# Altium PCB MEZ_ALL_IND.PcbDoc
Units mm, origin at the board's own origin, x right, y up, seen from the top; angles counter-clockwise.
Board outline 73.5 x 43 mm, 2 copper layers (Top Layer, Bottom Layer); 7 components, 16 nets, 63 pads, 0 vias.
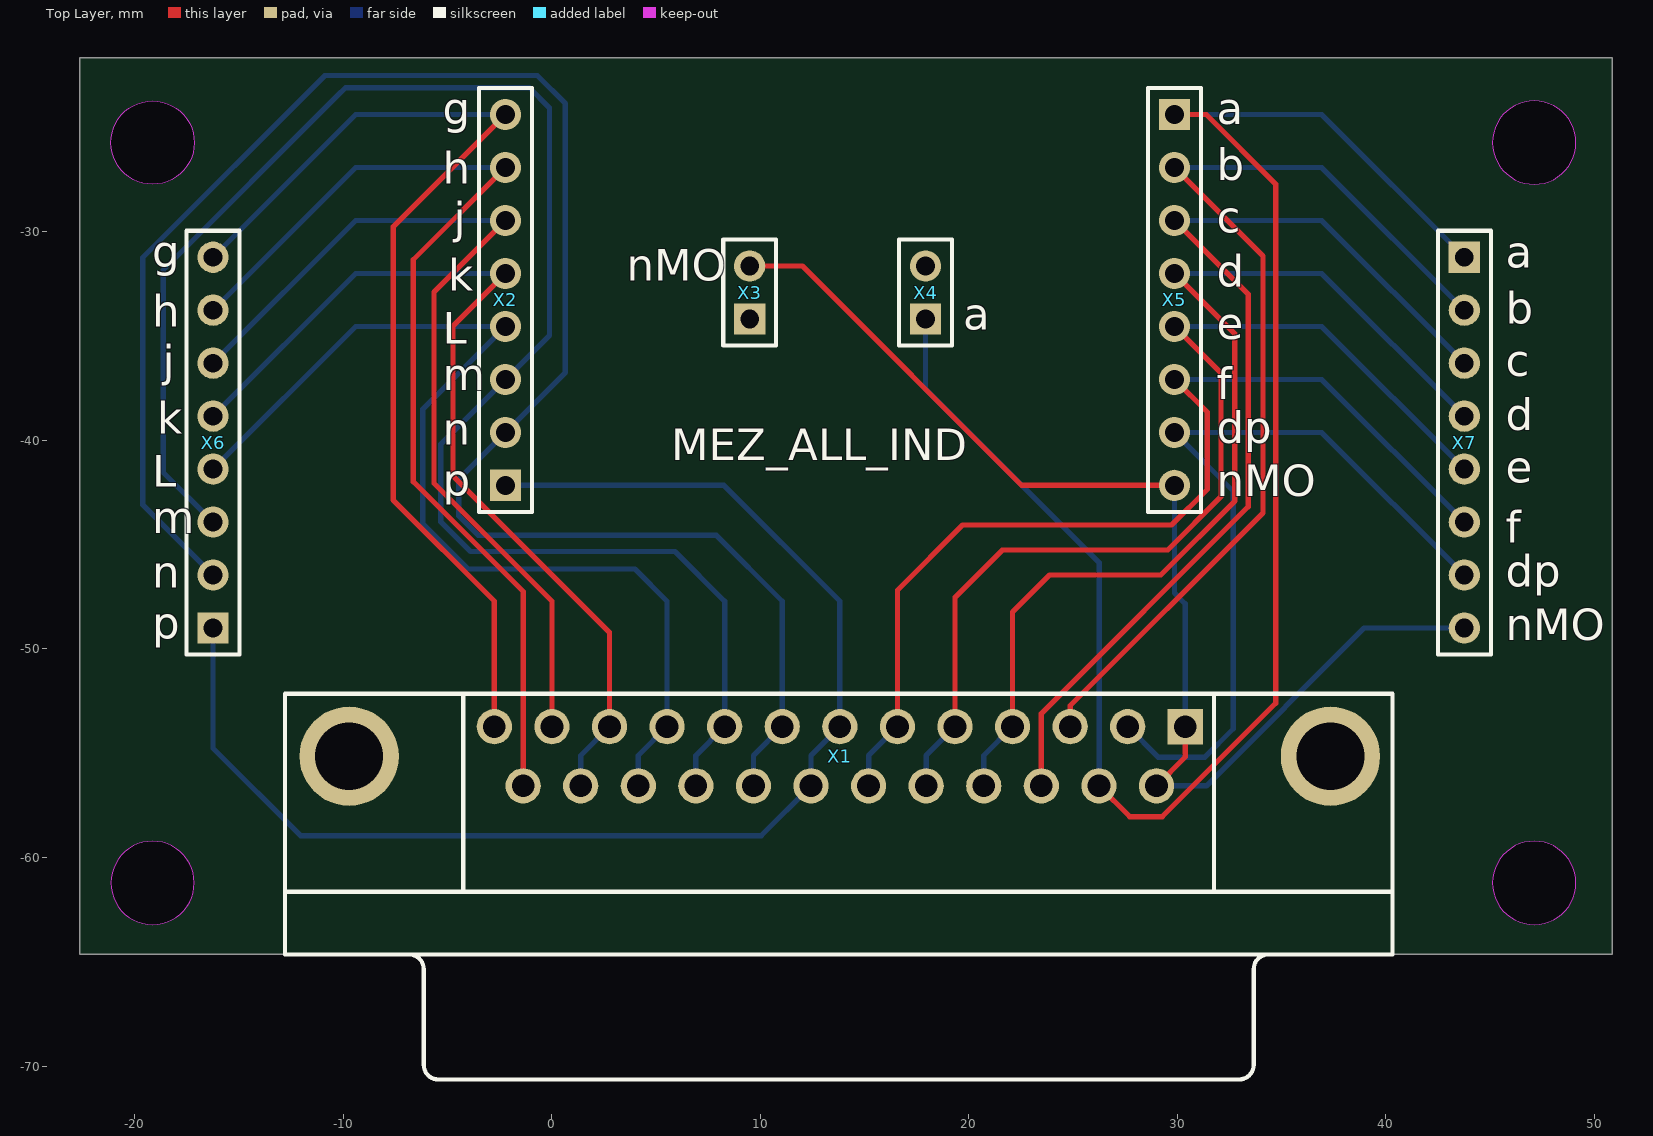
[diagram p0: Top Layer view]
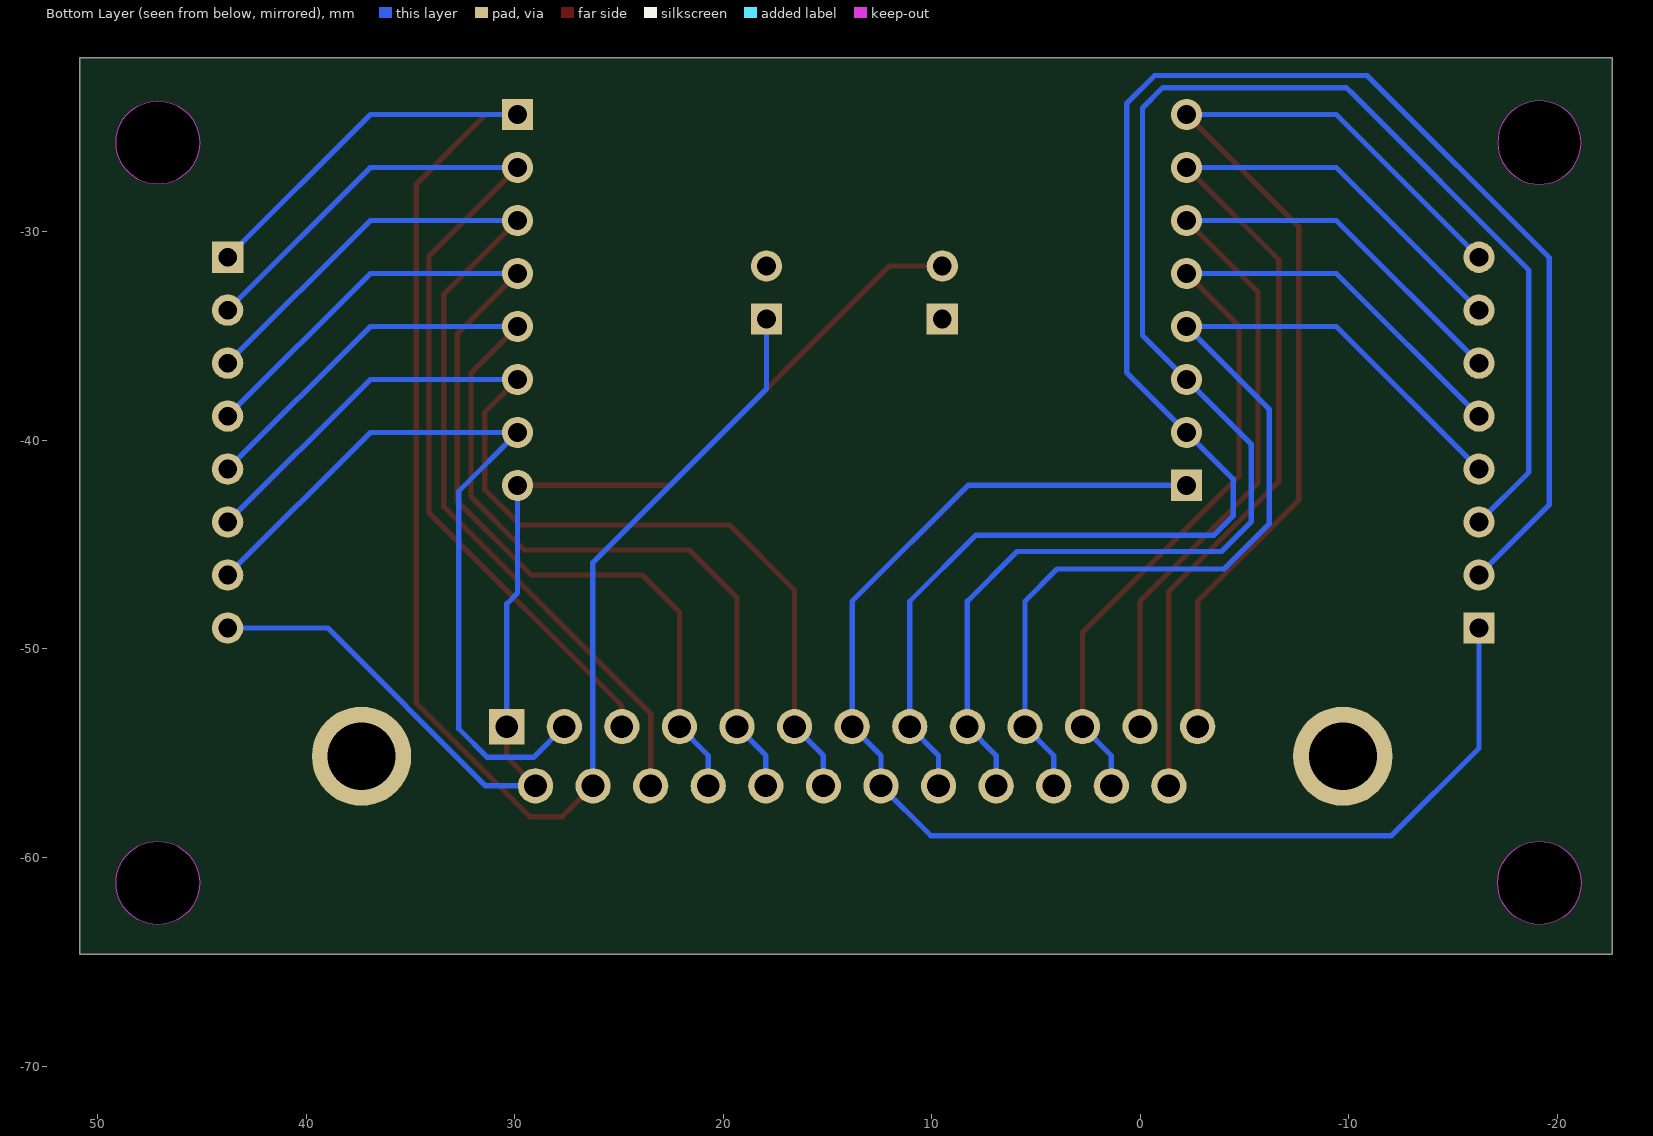
[diagram p1: Bottom Layer view, seen from below]

## Layer stack, top to bottom
Top Solder: solder mask 0.0102, Solder Resist, Dk 3.5
Top Layer: signal copper 0.0356
Dielectric 1: dielectric 0.32, FR-4, Dk 4.8
Bottom Layer: signal copper 0.0356
Bottom Solder: solder mask 0.0102, Solder Resist, Dk 3.5

## Board outline
-22.631,-64.643 50.869,-64.643 50.869,-21.643 -22.631,-21.643
cut-out: -21.131,-61.218 ccw(c-19.131,-61.218) -19.131,-63.218 ccw(c-19.131,-61.218) -17.131,-61.218 ccw(c-19.131,-61.218) -19.131,-59.218 ccw(c-19.131,-61.218)
cut-out: 45.119,-61.218 ccw(c47.119,-61.218) 47.119,-63.218 ccw(c47.119,-61.218) 49.119,-61.218 ccw(c47.119,-61.218) 47.119,-59.218 ccw(c47.119,-61.218)
cut-out: 45.119,-25.718 ccw(c47.119,-25.718) 47.119,-27.718 ccw(c47.119,-25.718) 49.119,-25.718 ccw(c47.119,-25.718) 47.119,-23.718 ccw(c47.119,-25.718)
cut-out: -19.131,-27.718 cw(c-19.131,-25.718) -21.131,-25.718 cw(c-19.131,-25.718) -19.131,-23.718 cw(c-19.131,-25.718) -17.131,-25.718 cw(c-19.131,-25.718)

## Design rules (kind name [scope] priority, off if disabled: settings)
Clearance [All] p1: gap=0.254 ignorepadtopadclearanceinfootprint=FALSE except(0: Arc-Hole Track-Hole SMDPad-Hole THPad-Hole Via-Hole Fill-Hole Poly-Hole Region-Hole Text-Hole)
PolygonConnect [All] p1: connectstyle=Relief reliefconductorwidth=0.254 reliefentries=4 polygonreliefangle="90 Angle" airgapwidth=0.254
RoutingVias [All] p1: holewidth=0.711 width=1.27 viastyle="Through Hole" minholewidth=0.711 minwidth=1.27 maxholewidth=0.711 maxwidth=1.27
SolderMaskExpansion [All] p1: expansion=0.102 istentingtop=FALSE
Width [All] p1: maxlimit=0.254 minlimit=0.254 preferedwidth=0.254
30 further rules are at their usual default settings.

## Components (designator, comment, footprint, x,y, rotation, side; value= is the part's Value field where it differs from the comment)
X1 "D Connector 25" DSUB1.385-2H25A 13.822,-64.644 r180 top
X2 "Header 8" HDR1X8 -2.211,-42.156 r90 top
X3 "Header 2" HDR1X2 9.499,-34.18 r90 top
X4 "Header 2" HDR1X2 17.931,-34.18 r90 top
X5 "Header 8" HDR1X8 29.869,-24.376 r270 top
X6 "Header 8" HDR1X8 -16.231,-48.997 r90 top
X7 "Header 8" HDR1X8 43.769,-31.217 r270 top

## Footprints (in the part's own frame and the unit in brackets; to place one, negate y for a bottom-side part, rotate by r counter-clockwise, add the part's x,y. Pads: shape width x height; smd on the part's side, far side on the other; paste and mask are expansions set on the pad)
DSUB1.385-2H25A [mm] "Connector; D Subminiature; 25 Position; Right Angle; Pitch 1.385 mm"
  rect 1.69x1.69 hole 1.09: 1(-16.566,-10.92)
  round 1.69 hole 1.09: 2(-13.805,-10.92) 3(-11.044,-10.92) 4(-8.283,-10.92) 5(-5.522,-10.92) 6(-2.761,-10.92) 7(0,-10.92) 8(2.761,-10.92) 9(5.522,-10.92) 10(8.283,-10.92) 11(11.044,-10.92) 12(13.805,-10.92) 13(16.566,-10.92) 14(-15.185,-8.08) 15(-12.424,-8.08) 16(-9.663,-8.08) 17(-6.902,-8.08) 18(-4.141,-8.08) 19(-1.38,-8.08) 20(1.381,-8.08) 21(4.142,-8.08) 22(6.903,-8.08) 23(9.664,-8.08) 24(12.425,-8.08) 25(15.186,-8.08)
  round 4.76 hole 3.26: 26(-23.526,-9.5) 27(23.526,-9.5)
  silkscreen extent -26.5,-12.5 26.6,6
HDR1X2 [mm] "Connector; Header; 2 Position"
  rect 1.5x1.5 hole 0.9: 1(0,0)
  round 1.5 hole 0.9: 2(2.54,0)
  silkscreen extent -1.27,-1.27 3.81,1.27
HDR1X8 [mm] "Connector; Header; 8 Position"
  rect 1.5x1.5 hole 0.9: 1(0,0)
  round 1.5 hole 0.9: 2(2.54,0) 3(5.08,0) 4(7.62,0) 5(10.16,0) 6(12.7,0) 7(15.24,0) 8(17.78,0)
  silkscreen extent -1.27,-1.27 19.05,1.27

## Part data
X1: "Receptacle Assembly, 25 Position, Right Angle", PackageDocument=U, DatasheetDocument=19-Mar-1999, Gender=Receptacle, LatestRevisionDate=17-Jul-2002, LatestRevisionNote="Re-released for DXP Platform.", Orientation="Right Angle", PackageReference=787202, Positions=25, Published=15-Jun-2001, Publisher="Altium Limited"
X2 X5 X6 X7: "Header, 8-Pin", LatestRevisionDate=17-Jul-2002, LatestRevisionNote="Re-released for DXP Platform.", Publisher="Altium Limited"
X3 X4: "Header, 2-Pin", LatestRevisionDate=17-Jul-2002, LatestRevisionNote="Re-released for DXP Platform.", Publisher="Altium Limited"

## Nets (pads, with @x,y where several pads share a name; then routed paths per layer and width w, separated by ;. In a path a pad name is that pad's centre, name@x,y a point inside that pad or via, vN(x,y) a via of type N, cw(c..) or ccw(c..) an arc to the next point about the centre after c; other vN are vias at no path point)
\M\O\: X1.1 X1.14 X3.2 X5.8 X7.8 | length 57.8
  Top Layer w0.254: X3.2 12.031,-31.64 22.547,-42.156 X5.8 ; X1.14 30.388,-55.184 X1.1
  Bottom Layer w0.254: X1.14 31.396,-56.564 38.964,-48.997 X7.8 ; X5.8 29.869,-47.319 30.388,-47.838 X1.1
a: X1.15 X4.1 X5.1 X7.1 | length 85
  Top Layer w0.254: X1.15 27.722,-58.04 29.285,-58.04 34.722,-52.603 34.722,-27.704 31.393,-24.376 X5.1
  Bottom Layer w0.254: X4.1 17.931,-37.533 26.258,-45.859 X1.15@26.258,-56.564 ; X5.1 36.928,-24.376 X7.1
b: X1.3 X5.2 X7.2 | length 49.1
  Top Layer w0.254: X1.3 24.866,-52.724 34.112,-43.478 34.112,-31.158 X5.2
  Bottom Layer w0.254: X5.2 36.928,-26.916 X7.2
c: X1.16 X5.3 X7.3 | length 49.4
  Top Layer w0.254: X1.16 23.486,-53.095 33.401,-43.18 33.401,-32.987 X5.3
  Bottom Layer w0.254: X5.3 36.928,-29.456 X7.3
d: X1.4 X1.17 X5.4 X7.4 | length 50.6
  Top Layer w0.254: X1.4 22.105,-48.227 23.876,-46.457 29.21,-46.457 32.765,-42.902 32.765,-34.891 X5.4
  Bottom Layer w0.254: X1.17 20.725,-55.105 X1.4 ; X5.4 36.928,-31.996 X7.4
dp: X1.2 X5.7 X7.7 | length 38.3
  Bottom Layer w0.254: X1.2 29.098,-55.195 31.317,-55.195 32.689,-53.824 32.689,-42.435 X5.7 36.928,-39.616 X7.7
e: X1.5 X1.18 X5.5 X7.5 | length 50.2
  Top Layer w0.254: X1.5 19.344,-47.525 21.614,-45.254 29.549,-45.254 32.105,-42.698 32.105,-36.771 X5.5
  Bottom Layer w0.254: X1.18 17.964,-55.105 X1.5 ; X5.5 36.928,-34.536 X7.5
f: X1.6 X1.19 X5.6 X7.6 | length 49.5
  Top Layer w0.254: X1.6 16.583,-47.187 19.709,-44.061 29.726,-44.061 31.444,-42.343 31.444,-38.65 X5.6
  Bottom Layer w0.254: X1.19 15.203,-55.105 X1.6 ; X5.6 36.928,-37.076 X7.6
g: X1.13 X2.8 X6.8 | length 50.4
  Top Layer w0.254: X1.13 -2.744,-47.712 -7.596,-42.86 -7.596,-29.76 X2.8
  Bottom Layer w0.254: X6.8 -9.39,-24.376 X2.8
h: X1.25 X2.7 X6.7 | length 50.5
  Top Layer w0.254: X2.7 -6.63,-31.335 -6.63,-41.978 -1.352,-47.256 X1.25@-1.352,-56.564
  Bottom Layer w0.254: X6.7 -9.39,-26.916 X2.7
j: X1.12 X2.6 X6.6 | length 44.9
  Top Layer w0.254: X2.6 -5.64,-32.885 -5.64,-42.055 0.017,-47.712 X1.12
  Bottom Layer w0.254: X6.6 -9.39,-29.456 X2.6
k: X1.11 X1.24 X2.5 X6.5 | length 46.1
  Top Layer w0.254: X2.5 -4.725,-34.51 -4.725,-41.698 2.778,-49.202 X1.11
  Bottom Layer w0.254: X6.5 -9.39,-31.996 X2.5 ; X1.24 1.398,-55.105 X1.11
l: X1.10 X1.23 X2.4 X6.4 | length 50.6
  Bottom Layer w0.254: X6.4 -9.39,-34.536 X2.4 -6.173,-38.498 -6.173,-44.01 -4.014,-46.169 3.996,-46.169 5.539,-47.712 X1.10 4.159,-55.105 X1.23
m: X1.9 X1.22 X2.3 X6.3 | length 82.2
  Bottom Layer w0.254: X6.3 -18.618,-41.529 -18.618,-31.826 -10.236,-23.444 -9.881,-23.089 -1.067,-23.089 -0.102,-24.054 -0.102,-34.966 X2.3 -5.31,-40.174 -5.31,-43.908 -3.887,-45.331 5.919,-45.331 8.3,-47.712 X1.9 6.92,-55.105 X1.22
n: X1.8 X1.21 X2.2 X6.2 | length 89.6
  Bottom Layer w0.254: X6.2 -19.609,-43.078 -19.609,-31.242 -10.871,-22.504 -0.686,-22.504 0.66,-23.851 0.66,-36.744 X2.2 -4.446,-41.851 -4.446,-43.629 -3.532,-44.543 7.892,-44.543 11.061,-47.712 X1.8 9.681,-55.105 X1.21
p: X1.7 X1.20 X2.1 X6.1 | length 64.9
  Bottom Layer w0.254: X6.1 -16.231,-54.762 -12.04,-58.953 10.053,-58.953 X1.20 12.442,-55.105 X1.7 13.822,-47.712 8.266,-42.156 X2.1
pads on no net: X1.26 X1.27 X3.1 X4.2

## Silkscreen, mask and mechanical layers (free items; w line width, h text height)
Top Overlay:
  text "g" at -5.208,-24.833 h1.52
  text "a" at 31.901,-24.833 h1.52
  text "b" at 31.901,-27.525 h1.52
  text "h" at -5.208,-27.703 h1.52
  text "c" at 31.901,-30.04 h1.52
  text "j" at -4.7,-30.091 h1.52
  text "g" at -19.153,-31.691 h1.52
  text "a" at 45.744,-31.716 h1.52
  text "nMO" at 3.606,-32.351 h1.52
  text "d" at 31.901,-32.631 h1.52
  text "k" at -4.954,-32.834 h1.52
  text "b" at 45.744,-34.409 h1.52
  text "h" at -19.153,-34.561 h1.52
  text "a" at 19.735,-34.688 h1.52
  text "e" at 31.901,-35.145 h1.52
  text "L" at -5.208,-35.374 h1.52
  text "c" at 45.744,-36.923 h1.52
  text "j" at -18.645,-36.949 h1.52
  text "m" at -5.208,-37.584 h1.52
  text "f" at 31.901,-38.015 h1.52
  text "d" at 45.744,-39.514 h1.52
  text "k" at -18.899,-39.692 h1.52
  text "dp" at 31.902,-40.132 h1.52
  text "n" at -5.208,-40.2 h1.52
  text "MEZ_ALL_IND" at 5.734,-40.961 h1.52
  text "e" at 45.744,-42.029 h1.52
  text "L" at -19.153,-42.232 h1.52
  text "p" at -5.208,-42.664 h1.52
  text "nMO" at 31.901,-42.689 h1.52
  text "m" at -19.153,-44.442 h1.52
  text "f" at 45.744,-44.899 h1.52
  text "dp" at 45.745,-47.015 h1.52
  text "n" at -19.153,-47.058 h1.52
  text "p" at -19.153,-49.522 h1.52
  text "nMO" at 45.744,-49.572 h1.52
Mechanical 1:
  circle w0.254: c47.119,-61.218 r2
  circle w0.254: c-19.131,-61.218 r2
  circle w0.254: c47.119,-25.718 r2
  circle w0.254: c-19.131,-25.718 r2
  lines w0.254: -22.631,-64.643 50.869,-64.643 50.869,-21.643 -22.631,-21.643 -22.631,-64.643